# Altium PCB dv_analog_6_ch.PcbDoc (part 2 of 2)
Units mm, origin at the board's own origin, x right, y up, seen from the top; angles counter-clockwise.
Board outline 86.22 x 62.2 mm, 4 copper layers (Top Layer, GND, power, Bottom Layer), stack 1.781 mm thick; 215 components, 117 nets, 545 pads, 83 vias.
Unrouted connection lines stored in the file: 307.
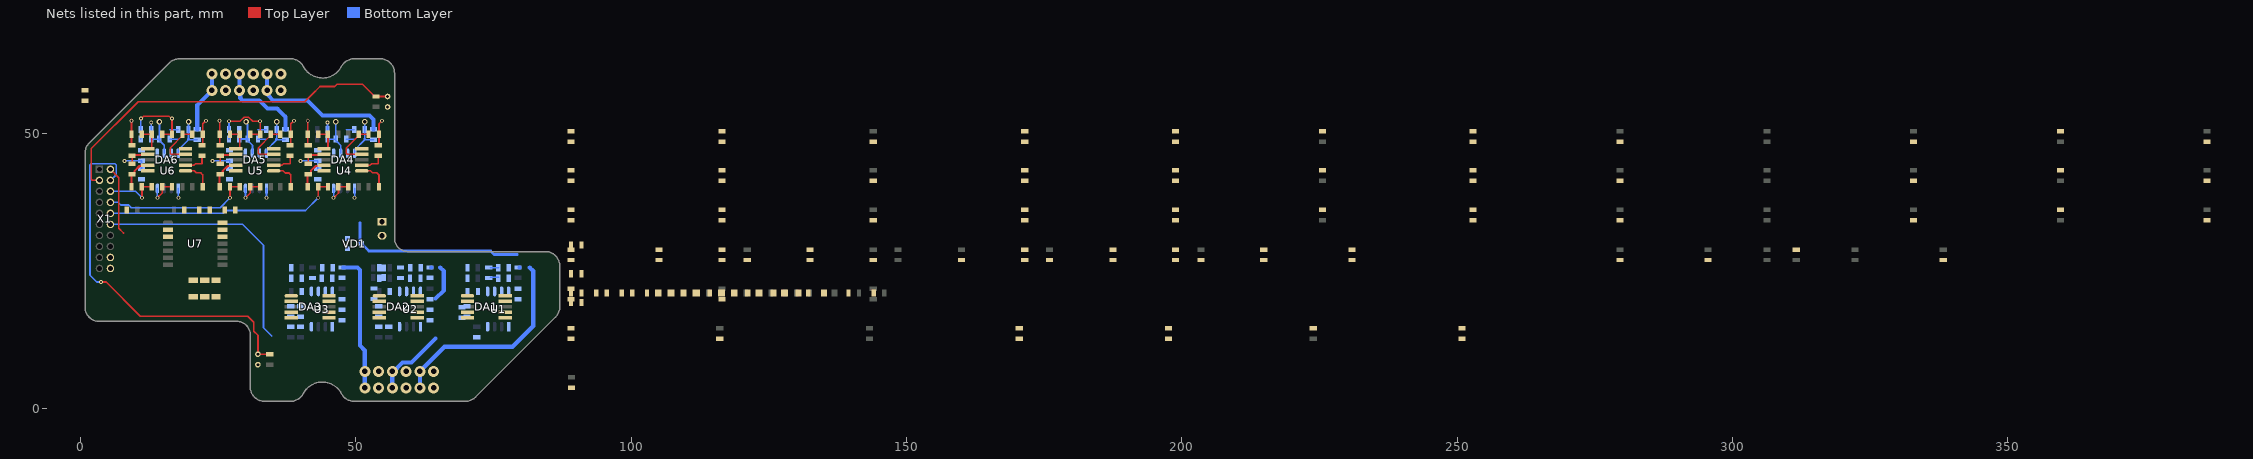
[diagram p4: the nets of this part, all layers, seen from the top]

## Via types
v1: diameter 0.7, hole 0.4, Top Layer to Bottom Layer, 38 vias
v2: diameter 2, hole 1, Top Layer to Bottom Layer, 32 vias
v3: diameter 4, hole 2.6, Top Layer to Bottom Layer, 7 vias
v4: diameter 1, hole 0.6, Top Layer to Bottom Layer, 6 vias

## Nets (pads, with @x,y where several pads share a name; then routed paths per layer and width w, separated by ;. In a path a pad name is that pad's centre, name@x,y a point inside that pad or via, vN(x,y) a via of type N, cw(c..) or ccw(c..) an arc to the next point about the centre after c; other vN are vias at no path point) (continued)
data_22_dv_analog_interface_ch5: C51.2 C54.2 C58.2 R80.2 | length 13.4
  Top Layer w0.3: v1(27,52.2) 29,52.2 29.25,52.45 29.25,52.452 29.748,52.95 30.55,52.95 31.3,52.2 v1(32.648,52.2) C54.2@32.648,49.85 C58.2@30.864,49.85
  Bottom Layer w0.3: R80.2@26.99,48.95 26.99,50.4 C51.2@26.995,50.405 ; C51.2@26.99,50.675 27,50.685 v1(27,52.2)
data_22_dv_analog_interface_ch6: C63.2 C66.2 C70.2 R99.2 | length 14.4
  Top Layer w0.3: v1(11,52.7) 11.108,52.7 11.536,53.128 16.112,53.128 16.54,52.7 v1(16.648,52.7) C66.2@16.648,49.85 C70.2@14.864,49.85
  Bottom Layer w0.3: R99.2@10.99,48.95 10.99,50.4 10.995,50.405 10.995,52.695 v1(11,52.7)
data_23: C35.2 R52.1 R53.2 R54.2 X1.12 | length 46.5
  Bottom Layer w0.3: X1.12@5.466,33.468 29.489,33.468 33.25,29.707 33.25,14.707 34.757,13.2
data_24: C47.2 R71.1 R72.2 R73.2 X1.10 | length 42.7
  Top Layer w0.3: v1@43.186,38.249 v1@43.191,38.244 ; v1(43.191,38.3) 43.188,38.303 43.188,40.294 R72.2@43.186,40.297 C47.2@44.969,40.297
  Bottom Layer w0.3: X1.10@5.466,35.468 25.968,35.468 26.5,36 40.891,36 v1(43.191,38.3)
data_25: C59.2 R90.1 R91.2 R92.2 X1.8 | length 26.7
  Top Layer w0.3: v1@27.186,38.249 v1@27.191,38.244 ; v1(27.191,38.3) 27.188,38.303 27.188,40.294 R91.2@27.186,40.297 C59.2@28.969,40.297
  Bottom Layer w0.3: X1.8@5.466,37.468 6.825,37.468 7.311,36.982 8.768,36.982 9.25,36.5 25.391,36.5 v1(27.191,38.3)
data_26: C71.2 R109.1 R110.2 R111.2 X1.6 | length 10
  Top Layer w0.3: v1@11.186,38.249 v1@11.191,38.244 ; v1(11.191,38.3) 11.188,38.303 11.188,40.294 R110.2@11.186,40.297 C71.2@12.969,40.297
  Bottom Layer w0.3: X1.6@5.466,39.468 10.023,39.468 v1(11.191,38.3)
GND: C73.2 C74.2 C75.2 L1.2 R118.2 U7.13 X1.18 | length 1.9
  Bottom Layer w0.3: 48.5,29.05 48.5,30.95
GNDA: C2.1 C3.1 C4.2 C5.1 C7.1 C8.1 C11.1 C14.1 C15.1 C16.2 C17.1 C19.1 C20.1 C23.1 C26.1 C27.1 C28.2 C29.1 C31.1 C32.1 C35.1 C38.1 C39.1 C40.2 C41.1 C43.1 C44.1 C47.1 C50.1 C51.1 C52.2 C53.1 C55.1 C56.1 C59.1 C62.1 C63.1 C64.2 C65.1 C67.1 C68.1 C71.1 L1.1 R9.1 R10.1 R12.2 R16.1 R28.1 R29.1 R31.2 R35.1 R47.1 R48.1 R50.2 R54.1 R66.1 R67.1 R69.2 R73.1 R85.1 R86.1 R88.2 R92.1 R104.1 R105.1 R107.2 R111.1 RK1.2 RK2.2 U1.1 U2.1 U3.1 U4.1 U5.1 U6.1 X1.20 | length 53.2
  Top Layer w0.3: v1(13.99,38.3) 14.869,39.179 C71.1@14.869,40.297 C67.1@16.643,40.297 ; R107.2@22.1,47.871 22.227,47.998 R105.1@22.227,49.85 22.227,51.727 v1(22.8,52.3) ; v1(29.99,38.3) 30.869,39.179 C59.1@30.869,40.297 C55.1@32.643,40.297 ; R88.2@38.1,47.871 38.227,47.998 R86.1@38.227,49.85 38.227,51.727 v1(38.8,52.3) ; v1(45.99,38.3) 46.869,39.179 C47.1@46.869,40.297 C43.1@48.643,40.297 ; R69.2@54.1,47.871 54.227,47.998 R67.1@54.227,49.85 54.227,51.727 v1(54.8,52.3)
  Bottom Layer w0.3: v1(8,45) 8.025,45.025 C62.1@11.112,45.025 C65.1@11.112,43.554 ; C63.1@12.89,50.675 v1(12.89,52) ; v1(13.99,38.3) 13.99,40 ; v1(17.8,38.3) U6.1@17.8,40 ; v1(24,45) 24.025,45.025 C50.1@27.112,45.025 C53.1@27.112,43.554 ; v1(29.99,38.3) 29.99,40 ; v1(33.8,38.3) U5.1@33.8,40 ; v1(40,45) 40.025,45.025 C38.1@43.112,45.025 C41.1@43.112,43.554 ; C39.1@44.89,50.675 v1(44.89,52) ; v1(45.99,38.3) 45.99,40 ; v1(49.8,38.3) U4.1@49.8,40
  other v2: 54.15,3.8 59.15,3.8 64.15,3.8 54.15,6.8 59.15,6.8 64.15,6.8 26.4,57.8 31.4,57.8 36.4,57.8 26.4,60.8 31.4,60.8 36.4,60.8
GPIO_1: X1.2 | length 12.6
  Top Layer w0.3: X1.2@5.466,43.468 7,41.934 7,32.75 7.85,31.9
Guard_dv_analog_interface_ch1: U1.7
Guard_dv_analog_interface_ch2: U2.7
Guard_dv_analog_interface_ch3: U3.7
Guard_dv_analog_interface_ch4: U4.7
Guard_dv_analog_interface_ch5: U5.7
Guard_dv_analog_interface_ch6: U6.7
input1: R3.1 | length 37.9
  Bottom Layer w0.75: v2(61.65,3.8) v2(61.65,6.8) 66.1,11.25 78.5,11.25 82.25,15 82.25,25 81.6,25.65
input2: R22.1 | length 19.7
  Bottom Layer w0.75: v2(56.65,3.8) 56.65,6.527 58.498,8.375 60.125,8.375 64.5,12.75 ; 64.5,20 66,21.5 66,25 65.35,25.65
  other v2: 56.65,6.8
input3: R41.1 | length 25
  Bottom Layer w0.75: R41.1@47.716,25.65 50.361,25.65 50.8,25.211 50.8,11.45 51.65,10.6 v2(51.65,6.8) v2(51.65,3.8)
input4: R60.1 | length 26.7
  Bottom Layer w0.75: v2(33.9,60.8) v2(33.9,57.8) 34.139,57.561 34.139,56.861 35,56 41.25,56 44,53.25 52.5,53.25 53.241,52.509 R60.1@53.241,50.75
input5: R79.1 | length 16.3
  Bottom Layer w0.75: v2(28.9,60.8) v2(28.9,57.8) 29.045,57.655 29.045,56.439 29.484,56 32.5,56 34,54.5 35.75,54.5 37.241,53.009 R79.1@37.241,50.75
input6: R98.1 | length 11.2
  Bottom Layer w0.75: R98.1@21.241,50.75 21.241,55.141 v2(23.9,57.8) v2(23.9,60.8)
NetC1_1: C1.1 R1.1 R3.2 U1.8
NetC1_2: C1.2 R1.2 R4.1 U1.6
NetC2_2: C2.2 R2.1 U1.5
NetC4_1: C4.1 R5.2 U1.4
NetC5_2: C5.2 DA1.8 R6.1
NetC6_1: C6.1 DA1.3 R10.2
NetC8_2: C8.2 DA1.4 R11.2
NetC9_1: C9.1 DA1.1 R8.1 R13.2 | length 1.5
  Bottom Layer w0.3: 16.266,48.95 17.742,48.95
NetC9_2: C9.2 DA1.2 R12.1 R13.1
NetC10_1: C10.1 DA1.5 R17.2
NetC12_1: C12.1 DA1.7 R15.1 R19.2
NetC12_2: C12.2 DA1.6 R18.1 R19.1
NetC13_1: C13.1 R20.1 R22.2 U2.8
NetC13_2: C13.2 R20.2 R23.1 U2.6
NetC14_2: C14.2 R21.1 U2.5
NetC16_1: C16.1 R24.2 U2.4
NetC17_2: C17.2 DA2.8 R25.1 | length 4.7
  Top Layer w0.3: 19.044,44.2 20.6,44.2 20.9,44.5 22.1,44.5 22.1,45.971
NetC18_1: C18.1 DA2.3 R29.2
NetC20_2: C20.2 DA2.4 R30.2
NetC21_1: C21.1 DA2.1 R27.1 R32.2 | length 1.5
  Bottom Layer w0.3: 32.266,48.95 33.742,48.95
NetC21_2: C21.2 DA2.2 R31.1 R32.1
NetC22_1: C22.1 DA2.5 R36.2
NetC24_1: C24.1 DA2.7 R34.1 R38.2
NetC24_2: C24.2 DA2.6 R37.1 R38.1
NetC25_1: C25.1 R39.1 R41.2 U3.8
NetC25_2: C25.2 R39.2 R42.1 U3.6
NetC26_2: C26.2 R40.1 U3.5
NetC28_1: C28.1 R43.2 U3.4 | length 1.5
  Bottom Layer w0.3: 16.266,50.675 17.743,50.675
NetC29_2: C29.2 DA3.8 R44.1
NetC30_1: C30.1 DA3.3 R48.2
NetC32_2: C32.2 DA3.4 R49.2
NetC33_1: C33.1 DA3.1 R46.1 R51.2
NetC33_2: C33.2 DA3.2 R50.1 R51.1
NetC34_1: C34.1 DA3.5 R55.2
NetC36_1: C36.1 DA3.7 R53.1 R57.2
NetC36_2: C36.2 DA3.6 R56.1 R57.1
NetC37_1: C37.1 R58.1 R60.2 U4.8 | length 9.6
  Bottom Layer w0.3: R58.1@48.266,48.95 49.742,48.95 ; U4.8@49.8,46.4 49.8,46.972 51.643,48.814 51.643,48.949 ; 51.642,48.95 51.643,48.949 ; v4(51.643,52.1) C37.1@51.643,50.675 51.643,48.949 ; R60.2@53.241,48.85 51.742,48.85 51.643,48.949
NetC37_2: C37.2 R58.2 R61.1 U4.6 | length 9.1
  Bottom Layer w0.3: R61.1@44.89,48.95 R58.2@46.366,48.95 ; v4(46.366,52.1) 46.366,50.675 R58.2@46.366,48.95 ; U4.6@47.26,46.4 47.26,47.861 46.63,48.49 46.575,48.49 46.366,48.7 R58.2@46.366,48.95 ; 48.266,50.675 C37.2@49.743,50.675
NetC38_2: C38.2 R59.1 U4.5
NetC40_1: C40.1 R62.2 U4.4
NetC41_2: C41.2 DA4.8 R63.1
NetC42_1: C42.1 DA4.3 R67.2 | length 9
  Top Layer w0.3: DA4.3@51.044,46.2 48.476,46.2 48.3,46.376 48.3,47.352 50.548,49.6 C42.1@50.548,49.85 R67.2@52.327,49.85
NetC44_2: C44.2 DA4.4 R68.2
NetC45_1: C45.1 DA4.1 R65.1 R70.2 | length 5.7
  Top Layer w0.3: DA4.1@51.044,43.2 52.7,43.2 53.05,42.85 53.85,42.85 54.1,42.6 54.227,42.473 R65.1@54.227,40.297
NetC45_2: C45.2 DA4.2 R69.1 R70.1 | length 4.7
  Top Layer w0.3: DA4.2@51.044,44.2 52.6,44.2 52.9,44.5 54.1,44.5 R69.1@54.1,45.971
NetC46_1: C46.1 DA4.5 R74.2 | length 4.6
  Top Layer w0.3: R74.2@43.186,49.85 C46.1@44.964,49.85 ; DA4.5@44.242,47.2 44.797,47.2 44.964,47.367 C46.1@44.964,49.35
NetC48_1: C48.1 DA4.7 R72.1 R76.2 | length 6.1
  Top Layer w0.381: R72.1@41.286,40.297 41.286,42.486 R76.2@41.4,42.6 41.65,42.6 41.859,42.81 41.859,43.187 42.746,44.073 44.115,44.073 DA4.7@44.242,44.2
NetC48_2: C48.2 DA4.6 R75.1 R76.1 | length 4.4
  Top Layer w0.3: R76.1@41.4,44.5 R75.1@41.4,45.971 41.514,46.086 44.128,46.086 DA4.6@44.242,46.2
NetC49_1: C49.1 R77.1 R79.2 U5.8 | length 8.1
  Bottom Layer w0.3: U5.8@33.8,46.4 33.8,46.972 35.643,48.814 35.643,48.949 ; 35.642,48.95 35.643,48.949 ; v4(35.643,52.1) C49.1@35.643,50.675 35.643,48.949 ; R79.2@37.241,48.85 35.742,48.85 35.643,48.949
NetC49_2: C49.2 R77.2 R80.1 U5.6 | length 9.2
  Bottom Layer w0.3: v4(30.1,52.1) 30.1,51.911 30.366,51.645 30.366,50.675 R77.2@30.366,48.95 30.366,48.7 30.575,48.49 30.63,48.49 31.26,47.861 U5.6@31.26,46.4 ; 32.266,50.675 C49.2@33.743,50.675
  Bottom Layer w0.381: R80.1@28.89,48.95 R77.2@30.366,48.95
NetC50_2: C50.2 R78.1 U5.5
NetC52_1: C52.1 R81.2 U5.4
NetC53_2: C53.2 DA5.8 R82.1
NetC54_1: C54.1 DA5.3 R86.2 | length 9
  Top Layer w0.3: DA5.3@35.044,46.2 32.476,46.2 32.3,46.376 32.3,47.352 34.548,49.6 C54.1@34.548,49.85 R86.2@36.327,49.85
NetC56_2: C56.2 DA5.4 R87.2
NetC57_1: C57.1 DA5.1 R84.1 R89.2 | length 5.6
  Top Layer w0.3: DA5.1@35.1,43.2 36.8,43.2 37.207,42.793 37.907,42.793 38.1,42.6 38.227,42.473 R84.1@38.227,40.297
NetC57_2: C57.2 DA5.2 R88.1 R89.1 | length 4.7
  Top Layer w0.3: DA5.2@35.044,44.2 36.6,44.2 36.9,44.5 38.1,44.5 R88.1@38.1,45.971
NetC58_1: C58.1 DA5.5 R93.2 | length 4.6
  Top Layer w0.3: R93.2@27.186,49.85 C58.1@28.964,49.85 ; DA5.5@28.242,47.2 28.797,47.2 28.964,47.367 C58.1@28.964,49.35
NetC60_1: C60.1 DA5.7 R91.1 R95.2 | length 6.1
  Top Layer w0.381: R91.1@25.286,40.297 25.286,42.486 R95.2@25.4,42.6 25.65,42.6 25.859,42.81 25.859,43.187 26.746,44.073 28.115,44.073 DA5.7@28.242,44.2
NetC60_2: C60.2 DA5.6 R94.1 R95.1 | length 4.4
  Top Layer w0.3: R95.1@25.4,44.5 R94.1@25.4,45.971 25.514,46.086 28.128,46.086 DA5.6@28.242,46.2
NetC61_1: C61.1 R96.1 R98.2 U6.8 | length 8.1
  Bottom Layer w0.3: U6.8@17.8,46.4 17.8,46.972 19.643,48.814 19.643,48.949 ; 19.642,48.95 19.643,48.949 ; v4(19.643,52.1) C61.1@19.643,50.675 19.643,48.949 ; R98.2@21.241,48.85 19.742,48.85 19.643,48.949
NetC61_2: C61.2 R96.2 R99.1 U6.6 | length 7.6
  Bottom Layer w0.3: R99.1@12.89,48.95 R96.2@14.366,48.95 ; v4@14.3,52.1 v4@14.333,52.067 ; v4(14.366,52.1) 14.366,50.675 R96.2@14.366,48.95 ; U6.6@15.26,46.4 15.26,47.861 14.63,48.49 14.575,48.49 14.366,48.7 R96.2@14.366,48.95
NetC62_2: C62.2 R97.1 U6.5
NetC64_1: C64.1 R100.2 U6.4
NetC65_2: C65.2 DA6.8 R101.1
NetC66_1: C66.1 DA6.3 R105.2 | length 9
  Top Layer w0.3: DA6.3@19.044,46.2 16.476,46.2 16.3,46.376 16.3,47.352 18.548,49.6 C66.1@18.548,49.85 R105.2@20.327,49.85
NetC68_2: C68.2 DA6.4 R106.2
NetC69_1: C69.1 DA6.1 R103.1 R108.2 | length 7.1
  Top Layer w0.3: DA6.1@19.044,43.2 20.7,43.2 21.05,42.85 21.85,42.85 22.1,42.6 22.227,42.473 R103.1@22.227,40.297
  Bottom Layer w0.3: 74.466,23.85 75.942,23.85
NetC69_2: C69.2 DA6.2 R107.1 R108.1
NetC70_1: C70.1 DA6.5 R112.2 | length 4.6
  Top Layer w0.3: R112.2@11.186,49.85 C70.1@12.964,49.85 ; DA6.5@12.242,47.2 12.797,47.2 12.964,47.367 C70.1@12.964,49.35
NetC72_1: C72.1 DA6.7 R110.1 R114.2 | length 6.1
  Top Layer w0.381: R110.1@9.286,40.297 9.286,42.486 R114.2@9.4,42.6 9.65,42.6 9.86,42.81 9.86,43.187 10.746,44.073 12.115,44.073 DA6.7@12.242,44.2
NetC72_2: C72.2 DA6.6 R113.1 R114.1 | length 4.4
  Top Layer w0.3: R114.1@9.4,44.5 R113.1@9.4,45.971 9.514,46.086 12.128,46.086 DA6.6@12.242,46.2
NetC73_1: C73.1 C74.1 C75.1 R121.1 VD1.1 VD1.2 X2.1
NetR117_1: R117.1 R119.2
NetR118_1: R118.1 U7.2 U7.3
NetR119_1: R119.1 R120.2 U7.12 | length 1.5
  Bottom Layer w0.3: 74.466,25.575 75.943,25.575
NetU7_14: U7.14 VD1.3 X2.2 | length 33
  Bottom Layer w0.5: 50.79,33.75 50.79,30.2 50.99,30 51.025,30 52.385,28.64 63,28.64 65.25,28.64 74.514,28.64 75.154,28 79.339,28
Temp_1: R115.1 RK1.1 X1.3 | length 66.7
  Top Layer w0.3: X1.3@3.466,41.468 3.434,41.5 2.176,41.5 2,41.676 2,47.25 10.5,55.75 40.76,55.75 42.05,57.04 43.51,58.5 46.175,58.5 46.625,58.95 49.29,58.95 51.2,58.95 53.45,56.7 R115.1@53.7,56.7 RK1.1@55.8,56.7
Temp_2: R116.1 RK2.1 X1.4 | length 69.8
  Top Layer w0.3: v1(3.75,23) 4.7,23 10.9,16.8 30.4,16.8 31.5,15.7 31.5,14.072 32.25,13.322 RK2.1@32.25,9.905 32.252,9.902 34.397,9.902 R116.1@34.4,9.9
  Bottom Layer w0.3: v1(3.75,23) 3,23 1.75,24.25 1.75,44.328 1.926,44.504 6.246,44.504 6.502,44.248 6.502,42.504 X1.4@5.466,41.468
Voffset: R17.1 R18.2 R36.1 R37.2 R55.1 R56.2 R74.1 R75.2 R93.1 R94.2 R112.1 R113.2 | length 14.1
  Top Layer w0.3: v1@9.289,52.523 9.289,52.3 9.286,52.297 R112.1@9.286,49.85 9.286,47.985 R113.2@9.4,47.871 ; v1@25.289,52.523 25.289,52.3 25.286,52.297 R93.1@25.286,49.85 25.286,47.985 R94.2@25.4,47.871 ; v1@41.289,52.523 41.289,52.3 41.286,52.297 R74.1@41.286,49.85 41.286,47.985 R75.2@41.4,47.871
  other v1: 9.286,52.3 25.286,52.3 41.286,52.3
pads on no net: DA1.0 DA2.0 DA3.0 DA4.0 DA5.0 DA6.0 U1.2 U1.3 U2.2 U2.3 U3.2 U3.3 U4.2 U4.3 U5.2 U5.3 U6.2 U6.3 U7.1 U7.4 U7.5 U7.6 U7.7 U7.8 U7.9 U7.10 U7.11
copper on no net: | length 978.4
  Top Layer w0.2: 5.466,15.95 3.466,15.95 cw(c3.466,18.45) 0.966,18.45 0.966,46.414 cw(c3.466,46.414) 1.699,48.182 16.234,62.718 cw(c18.002,60.95) 18.002,63.45 38.2,63.45 cw(c38.2,60.95) 40.418,62.104 ccw(c43.966,63.95) 47.515,62.104 ; 12.015,58.452 18.005,58.452 ; 18.005,58.45 ccw(c18.005,60.95) 20.505,60.95 cw(c23.505,60.95) 21.847,63.45 ; 30.966,3.95 ccw(c33.466,3.95) 33.466,1.45 38.2,1.45 ccw(c38.2,3.95) 40.418,2.796 cw(c43.966,0.95) 47.515,2.796 ccw(c49.733,3.95) 49.733,1.45 69.931,1.45 ccw(c69.931,3.95) 71.699,2.182 86.234,16.718 ccw(c84.466,18.486) 86.966,18.486 ; 30.966,7.792 ccw(c33.466,9.45) 33.466,6.45 cw(c33.466,3.95) 35.562,5.314 ccw(c38.076,6.95) 38.076,3.95 41.321,3.95 ; 46.601,60.94 49.613,60.94 cw(c49.857,57.95) 52.371,59.586 ccw(c54.466,60.95) 54.466,58.45 cw(c54.466,55.45) 56.966,57.108 ; 66.089,1.45 ccw(c64.431,3.95) 67.431,3.95 cw(c69.931,3.95) 69.931,6.45 75.724,6.45 ccw(c75.724,9.45) 75.977,6.461 ; 0.951,46.412 cw(c3.451,46.412) 1.684,48.179 ; 0.951,46.412 cw(c3.451,46.412) 1.684,48.179 ; 0.951,46.412 0.951,18.447 ccw(c3.451,18.447) 3.451,15.947 28.451,15.947 cw(c28.451,13.447) 30.951,13.447 30.951,3.947 ccw(c33.451,3.947) 33.451,1.447 38.185,1.447 ccw(c38.185,3.947) 40.403,2.793 cw(c43.951,0.947) 47.5,2.793 ccw(c49.718,3.947) 49.718,1.447 69.916,1.447 ccw(c69.916,3.947) 71.684,2.179 86.219,16.715 ccw(c84.451,18.483) 86.951,18.483 86.951,25.947 ccw(c84.451,25.947) 84.451,28.447 59.451,28.447 cw(c59.451,30.947) 56.951,30.947 56.951,60.947 ccw(c54.451,60.947) 54.451,63.447 49.718,63.447 ccw(c49.718,60.947) 47.5,62.101 cw(c43.951,63.947) 40.403,62.101 ccw(c38.185,60.947) 38.185,63.447 17.987,63.447 ccw(c17.987,60.947) 16.219,62.715 1.684,48.179
  Top Layer w0.3: 49,56.7 v1(49,58.25)
  Bottom Layer w0.2: 5.466,15.95 3.466,15.95 cw(c3.466,18.45) 0.966,18.45 0.966,46.414 cw(c3.466,46.414) 1.699,48.182 16.234,62.718 cw(c18.002,60.95) 18.002,63.45 38.2,63.45 cw(c38.2,60.95) 40.418,62.104 ccw(c43.966,63.95) 47.515,62.104 ; 12.015,58.452 18.005,58.452 ; 18.005,58.45 ccw(c18.005,60.95) 20.505,60.95 cw(c23.505,60.95) 21.847,63.45 ; 30.966,3.95 ccw(c33.466,3.95) 33.466,1.45 38.2,1.45 ccw(c38.2,3.95) 40.418,2.796 cw(c43.966,0.95) 47.515,2.796 ccw(c49.733,3.95) 49.733,1.45 69.931,1.45 ccw(c69.931,3.95) 71.699,2.182 86.234,16.718 ccw(c84.466,18.486) 86.966,18.486 ; 30.966,7.792 ccw(c33.466,9.45) 33.466,6.45 cw(c33.466,3.95) 35.562,5.314 ccw(c38.076,6.95) 38.076,3.95 41.321,3.95 ; 46.601,60.94 49.613,60.94 cw(c49.857,57.95) 52.371,59.586 ccw(c54.466,60.95) 54.466,58.45 cw(c54.466,55.45) 56.966,57.108 ; 66.089,1.45 ccw(c64.431,3.95) 67.431,3.95 cw(c69.931,3.95) 69.931,6.45 75.724,6.45 ccw(c75.724,9.45) 75.977,6.461 ; 0.951,46.412 cw(c3.451,46.412) 1.684,48.179 ; 0.951,46.412 cw(c3.451,46.412) 1.684,48.179 ; 0.951,46.412 0.951,18.447 ccw(c3.451,18.447) 3.451,15.947 28.451,15.947 cw(c28.451,13.447) 30.951,13.447 30.951,3.947 ccw(c33.451,3.947) 33.451,1.447 38.185,1.447 ccw(c38.185,3.947) 40.403,2.793 cw(c43.951,0.947) 47.5,2.793 ccw(c49.718,3.947) 49.718,1.447 69.916,1.447 ccw(c69.916,3.947) 71.684,2.179 86.219,16.715 ccw(c84.451,18.483) 86.951,18.483 86.951,25.947 ccw(c84.451,25.947) 84.451,28.447 59.451,28.447 cw(c59.451,30.947) 56.951,30.947 56.951,60.947 ccw(c54.451,60.947) 54.451,63.447 49.718,63.447 ccw(c49.718,60.947) 47.5,62.101 cw(c43.951,63.947) 40.403,62.101 ccw(c38.185,60.947) 38.185,63.447 17.987,63.447 ccw(c17.987,60.947) 16.219,62.715 1.684,48.179
  Bottom Layer w0.3: v1@42.75,56.8 42.75,57.55 43.2,58 44.5,58 ; v1@42.8,56.8 v1(42.75,56.75) 42.75,56 43.2,55.55 44.5,55.55 ; 46.4,58 46.506,58 46.55,57.956 48.624,57.956 48.919,58.25 v1(49,58.25)
  other v2: 48,6.5 56.3,11.2 59.5,11.2 48,11.55 28.65,54 31.65,54 40,54.25 40,59
  other v3: 33.466,3.95 69.931,3.95 3.966,18.45 83.951,25.447 43.966,32.45 18.002,60.95 54.466,60.95

## Polygon pours and split planes (outlines as drawn)
data_11 on Top Layer "NONET_L04_P-001" (solid, pour order 10): 75.971,6.513 69.981,6.515 ccw(c69.98,3.973) 67.486,4.465 67.342,3.072 66.978,2.329 66.14,1.515 69.984,1.515 ccw(c69.984,4.228) 72.236,2.715
data_11 on Top Layer "NONET_L04_P-001" (solid, pour order 9): 41.16,3.757 ccw(c39.246,5.343) 41.345,4.011 ccw(c40.023,-35.237) 38.866,4.017 cw(c38.213,7.25) 36.451,4.461 34.712,6.201 ccw(c29.868,-11.127) 32.485,6.674 cw(c33.304,9.109) 31.343,7.449 30.996,7.858 30.996,4.017 ccw(c33.496,4.016) 33.496,1.517 38.521,1.517 39.593,1.837 40.217,2.461
data_11 on Top Layer "NONET_L04_P-001" (solid, pour order 6): 12.015,58.452 18.005,58.45 ccw(c18.006,60.993) 20.5,60.5 20.644,61.893 21.008,62.637 21.846,63.45 18.002,63.45 ccw(c18.002,60.737) 15.75,62.25
data_11 on Top Layer "NONET_L04_P-001" (solid, pour order 5): 46.822,61.15 ccw(c48.736,59.564) 46.638,60.896 ccw(c47.959,100.144) 49.116,60.891 cw(c49.769,57.657) 51.531,60.446 53.271,58.707 ccw(c58.114,76.035) 55.497,58.234 cw(c54.679,55.798) 56.639,57.459 56.986,57.049 56.986,60.891 ccw(c54.486,60.891) 54.486,63.391 49.461,63.391 48.389,63.07 47.765,62.446
data_11 on Top Solder "NONET_L04_P-001" (solid): 75.911,6.43 69.921,6.432 ccw(c69.92,3.89) 67.426,4.382 67.282,2.989 66.918,2.245 66.08,1.432 69.924,1.432 ccw(c69.924,4.145) 72.176,2.632
data_11 on Top Solder "NONET_L04_P-001" (solid): 41.127,3.687 ccw(c39.213,5.273) 41.312,3.941 ccw(c39.99,-35.307) 38.833,3.946 cw(c38.18,7.18) 36.418,4.391 34.679,6.13 ccw(c29.835,-11.197) 32.452,6.603 cw(c33.271,9.039) 31.31,7.378 30.963,7.788 30.963,3.946 ccw(c33.463,3.946) 33.463,1.446 38.488,1.446 39.56,1.767 40.184,2.391
data_11 on Top Solder "NONET_L04_P-001" (solid, pour order 7): 12.034,58.476 18.024,58.474 ccw(c18.025,61.016) 20.519,60.524 20.663,61.917 21.027,62.66 21.865,63.474 18.021,63.474 ccw(c18.021,60.761) 15.769,62.274
data_11 on Top Solder "NONET_L04_P-001" (solid): 46.808,61.204 ccw(c48.722,59.618) 46.623,60.95 ccw(c47.945,100.198) 49.102,60.945 cw(c49.754,57.711) 51.516,60.5 53.256,58.76 ccw(c58.099,76.088) 55.482,58.288 cw(c54.664,55.852) 56.625,57.513 56.972,57.103 56.972,60.945 ccw(c54.472,60.945) 54.472,63.445 49.446,63.445 48.374,63.124 47.75,62.5
data_11 on Bottom Layer "NONET_L04_P-001" (solid, pour order 13): 12.015,58.452 18.005,58.45 ccw(c18.006,60.993) 20.5,60.5 20.644,61.893 21.008,62.637 21.846,63.45 18.002,63.45 ccw(c18.002,60.737) 15.75,62.25
data_11 on Bottom Layer "NONET_L04_P-001" (solid, pour order 12): 46.822,61.15 ccw(c48.736,59.564) 46.637,60.896 ccw(c47.959,100.144) 49.116,60.891 cw(c49.769,57.657) 51.531,60.446 53.271,58.707 ccw(c58.114,76.035) 55.497,58.234 cw(c54.679,55.798) 56.639,57.459 56.986,57.049 56.986,60.891 ccw(c54.486,60.891) 54.486,63.391 49.461,63.391 48.389,63.07 47.765,62.446
data_11 on Bottom Layer "NONET_L04_P-001" (solid, pour order 16): 75.971,6.513 69.981,6.515 ccw(c69.98,3.973) 67.486,4.465 67.342,3.072 66.978,2.329 66.14,1.515 69.984,1.515 ccw(c69.984,4.228) 72.236,2.715
data_11 on Bottom Layer "NONET_L04_P-001" (solid, pour order 15): 41.16,3.757 ccw(c39.246,5.343) 41.345,4.011 ccw(c40.023,-35.237) 38.866,4.017 cw(c38.213,7.25) 36.451,4.461 34.712,6.201 ccw(c29.868,-11.127) 32.485,6.674 cw(c33.304,9.109) 31.343,7.449 30.996,7.858 30.996,4.017 ccw(c33.496,4.016) 33.496,1.517 38.521,1.517 39.593,1.837 40.217,2.461
data_11 on Bottom Solder "NONET_L04_P-001" (solid): 12.034,58.476 18.024,58.474 ccw(c18.025,61.016) 20.519,60.524 20.663,61.917 21.027,62.66 21.865,63.474 18.021,63.474 ccw(c18.021,60.761) 15.769,62.274
data_11 on Bottom Solder "NONET_L04_P-001" (solid): 75.911,6.43 69.921,6.432 ccw(c69.92,3.89) 67.426,4.382 67.282,2.989 66.918,2.245 66.08,1.432 69.924,1.432 ccw(c69.924,4.145) 72.176,2.632
data_11 on Bottom Solder "NONET_L04_P-001" (solid): 41.127,3.687 ccw(c39.213,5.272) 41.312,3.941 ccw(c39.99,-35.307) 38.833,3.946 cw(c38.18,7.18) 36.418,4.391 ccw(c22.974,-7.314) 34.679,6.13 ccw(c29.835,-11.197) 32.452,6.603 cw(c33.27,9.038) 31.31,7.378 30.963,7.788 30.963,3.946 ccw(c33.463,3.946) 33.463,1.446 38.488,1.446 39.56,1.767 40.184,2.391
data_11 on Bottom Solder "NONET_L04_P-001" (solid): 46.808,61.204 ccw(c48.721,59.619) 46.623,60.95 ccw(c47.945,100.198) 49.102,60.945 cw(c49.754,57.711) 51.389,60.576 53.261,58.704 ccw(c58.667,77.746) 55.789,58.162 cw(c54.664,55.852) 56.625,57.513 56.972,57.103 56.972,60.945 ccw(c54.472,60.945) 54.472,63.445 49.446,63.445 48.374,63.124 47.75,62.5
+5V on power (split plane): 243 vertices, not listed, extent 1.36,1.855 86.556,36.121
no net on power (split plane): 1.361,46.412
no net on power (split plane): 18,63.04 17.998,63.04
+5V on power (split plane): 52.871,50 52.88,49.95 52.908,49.908 52.95,49.88 53,49.871 56.541,49.871 56.541,30.948 56.541,30.947 56.542,30.944 56.542,30.943 56.551,30.719 56.577,30.492 56.622,30.268 56.684,30.048 56.763,29.833 56.859,29.626 56.97,29.427 57.097,29.237 57.239,29.057 57.394,28.889 57.405,28.879 40.054,28.879 39.379,29.554 39.379,36.121 51.75,36.121 51.8,36.13 51.842,36.158 51.87,36.2 51.879,36.25 51.879,40.25 51.87,40.3 51.842,40.342 51.8,40.37 51.75,40.379 10.379,40.379 10.379,50.121 44.891,50.121 44.94,50.13 44.982,50.158 45.011,50.2 45.02,50.25 45.02,56.371 52.871,56.371
Voffset on power (split plane): 246 vertices, not listed, extent 1.36,11.879 82.621,63.041
no net on power (split plane): 54.452,63.037 54.451,63.037 54.452,63.037
no net on power (split plane): 85.946,17.009 85.945,17.008 85.945,17.009 85.945,17.008 85.945,17.009 85.946,17.009
no net on power (split plane): 54.46,63.038 54.452,63.037 54.46,63.038
no net on power (split plane): 18,63.04
no net on power (split plane): 38.201,63.04 38.2,63.04 38.201,63.04
no net on power (split plane): 38.206,63.04 38.202,63.04 38.201,63.04 38.202,63.04 38.206,63.04
no net on GND (split plane): 38.206,63.04 38.202,63.04 38.201,63.04 38.202,63.04 38.206,63.04
no net on GND (split plane): 38.201,63.04 38.2,63.04 38.201,63.04
no net on GND (split plane): 85.946,17.009 85.945,17.008 85.945,17.009 85.945,17.008 85.945,17.009 85.946,17.009
no net on GND (split plane): 54.452,63.037 54.451,63.037 54.452,63.037
no net on GND (split plane): 18,63.04
GNDA on GND (split plane): 18,63.04 17.998,63.04
GNDA on GND (split plane): 1.361,46.412
GNDA on GND (split plane): 455 vertices, not listed, extent 1.36,1.855 86.556,63.041

## Other copper
GND (plane layer: these items are gaps in the copper):
  lines w0.254: 33,37.25 33,34.25 4.25,34.25 4.25,28.25 4.25,26.75 6.5,26.75 6.5,31.5 33,31.5 33,28.25 56.5,28.25 85.4,28.2
power (plane layer: these items are gaps in the copper):
  lines w0.254: 1,36 1.25,36.25 34.75,36.25 34.75,26.75 35.563,25.937 77.313,25.937 79,24.25 79,18.271 75.75,14.75 42.75,14.75 42.75,11.75 77.25,11.75 82.75,17.25 82.75,26.75 80.75,28.75 40,28.75 39.25,29.5 39.25,36.25 51.75,36.25 51.75,40.25 10.25,40.25 10.25,50.25 44.891,50.25 44.891,56.5 53,56.5 53,50 57,50 ; 1,36.75 1.125,36.75 1.375,36.5

## Silkscreen, mask and mechanical layers (free items; w line width, h text height)
Top Solder:
  lines w0.2: 11.97,58.447 16.247,62.723 cw(c18.014,60.955) 18.014,63.455 21.859,63.455 ccw(c23.518,60.956) 20.518,60.956 cw(c18.018,60.956) 18.018,58.456 ; 12.027,58.458 18.018,58.458 ; 41.312,3.942 ccw(c43.963,0.946) 40.414,2.792 cw(c38.197,3.946) 38.197,1.446 33.463,1.446 cw(c33.463,3.946) 30.963,3.946 30.963,7.788 ccw(c33.463,9.446) 33.463,6.446 cw(c33.463,3.946) 35.558,5.31 ccw(c38.073,6.946) 38.316,3.956 41.328,3.956 ; 46.606,60.935 49.618,60.935 cw(c49.862,57.945) 52.376,59.581 ccw(c54.472,60.945) 54.472,58.445 cw(c54.472,55.445) 56.972,57.103 56.972,60.945 ccw(c54.472,60.945) 54.472,63.445 49.738,63.445 ccw(c49.738,60.945) 47.52,62.099 cw(c43.972,63.945) 46.622,60.949 ; 69.928,6.448 75.918,6.448 ; 69.928,6.45 ccw(c69.928,3.95) 67.428,3.95 cw(c64.428,3.95) 66.086,1.45 69.931,1.451 ccw(c69.931,3.951) 71.699,2.183 75.975,6.459
Bottom Solder:
  lines w0.2: 11.97,58.447 16.247,62.723 cw(c18.014,60.955) 18.014,63.455 21.859,63.455 ccw(c23.518,60.956) 20.518,60.956 cw(c18.018,60.956) 18.018,58.456 ; 12.027,58.458 18.018,58.458 ; 41.312,3.942 ccw(c43.963,0.946) 40.414,2.792 cw(c38.197,3.946) 38.197,1.446 33.463,1.446 cw(c33.463,3.946) 30.963,3.946 30.963,7.788 ccw(c33.463,9.446) 33.463,6.446 cw(c33.463,3.946) 35.558,5.31 ccw(c38.073,6.946) 38.316,3.956 41.328,3.956 ; 46.606,60.935 49.618,60.935 cw(c49.862,57.945) 52.376,59.581 ccw(c54.472,60.945) 54.472,58.445 cw(c54.472,55.445) 56.972,57.103 56.972,60.945 ccw(c54.472,60.945) 54.472,63.445 49.738,63.445 ccw(c49.738,60.945) 47.52,62.099 cw(c43.972,63.945) 46.622,60.949 ; 69.928,6.448 75.918,6.448 ; 69.928,6.45 ccw(c69.928,3.95) 67.428,3.95 cw(c64.428,3.95) 66.086,1.45 69.931,1.451 ccw(c69.931,3.951) 71.699,2.183 75.975,6.459
Mechanical 1:
  circle w0.2: c83.951,25.447 r1.35
  circle w0.2: c43.951,32.447 r1.35
  circle w0.2: c54.451,60.947 r1.35
  circle w0.2: c69.916,3.947 r1.35
  circle w0.2: c17.987,60.947 r1.35
  circle w0.2: c33.451,3.947 r1.35
  circle w0.2: c3.951,18.447 r1.35
  lines w0.2: 5.466,15.95 3.466,15.95 cw(c3.466,18.45) 0.966,18.45 0.966,46.414 cw(c3.466,46.414) 1.699,48.182 16.234,62.718 cw(c18.002,60.95) 18.002,63.45 38.2,63.45 cw(c38.2,60.95) 40.418,62.104 ccw(c43.966,63.95) 47.515,62.104 ; 30.966,3.95 ccw(c33.466,3.95) 33.466,1.45 38.2,1.45 ccw(c38.2,3.95) 40.418,2.796 cw(c43.966,0.95) 47.515,2.796 ccw(c49.733,3.95) 49.733,1.45 69.931,1.45 ccw(c69.931,3.95) 71.699,2.182 86.234,16.718 ccw(c84.466,18.486) 86.966,18.486 ; 0.951,46.412 cw(c3.451,46.412) 1.684,48.179 ; 0.951,46.412 cw(c3.451,46.412) 1.684,48.179 ; 0.951,46.412 0.951,18.447 ccw(c3.451,18.447) 3.451,15.947 28.451,15.947 cw(c28.451,13.447) 30.951,13.447 30.951,3.947 ccw(c33.451,3.947) 33.451,1.447 38.185,1.447 ccw(c38.185,3.947) 40.403,2.793 cw(c43.951,0.947) 47.5,2.793 ccw(c49.718,3.947) 49.718,1.447 69.916,1.447 ccw(c69.916,3.947) 71.684,2.179 86.219,16.715 ccw(c84.451,18.483) 86.951,18.483 86.951,25.947 ccw(c84.451,25.947) 84.451,28.447 59.451,28.447 cw(c59.451,30.947) 56.951,30.947 56.951,60.947 ccw(c54.451,60.947) 54.451,63.447 49.718,63.447 ccw(c49.718,60.947) 47.5,62.101 cw(c43.951,63.947) 40.403,62.101 ccw(c38.185,60.947) 38.185,63.447 17.987,63.447 ccw(c17.987,60.947) 16.219,62.715 1.684,48.179
Mechanical 13:
  lines w0.2: 2.466,42.468 6.466,42.468 ; 2.766,25.468 3.466,25.468 ; 2.766,27.468 3.466,27.468 ; 2.766,29.468 3.466,29.468 ; 2.766,31.468 3.466,31.468 ; 2.766,33.468 3.466,33.468 ; 2.766,35.468 3.466,35.468 ; 2.766,37.468 3.466,37.468 ; 2.766,39.468 3.466,39.468 ; 2.766,41.468 3.466,41.468 ; 3.466,24.768 3.466,25.468 ; 3.466,26.168 3.466,25.468 ; 3.466,26.768 3.466,27.468 ; 3.466,28.168 3.466,27.468 ; 3.466,28.768 3.466,29.468 ; 3.466,30.168 3.466,29.468 ; 3.466,30.768 3.466,31.468 ; 3.466,32.168 3.466,31.468 ; 3.466,32.768 3.466,33.468 ; 3.466,34.168 3.466,33.468 ; 3.466,34.768 3.466,35.468 ; 3.466,36.168 3.466,35.468 ; 3.466,36.768 3.466,37.468 ; 3.466,38.168 3.466,37.468 ; 3.466,38.768 3.466,39.468 ; 3.466,40.168 3.466,39.468 ; 3.466,40.768 3.466,41.468 ; 3.466,42.168 3.466,41.468 ; 4.166,25.468 3.466,25.468 ; 4.166,27.468 3.466,27.468 ; 4.166,29.468 3.466,29.468 ; 4.166,31.468 3.466,31.468 ; 4.166,33.468 3.466,33.468 ; 4.166,35.468 3.466,35.468 ; 4.166,37.468 3.466,37.468 ; 4.166,39.468 3.466,39.468 ; 4.166,41.468 3.466,41.468 ; 4.766,25.468 5.466,25.468 ; 4.766,27.468 5.466,27.468 ; 4.766,29.468 5.466,29.468 ; 4.766,31.468 5.466,31.468 ; 4.766,33.468 5.466,33.468 ; 4.766,35.468 5.466,35.468 ; 4.766,37.468 5.466,37.468 ; 4.766,39.468 5.466,39.468 ; 4.766,41.468 5.466,41.468 ; 5.466,24.768 5.466,25.468 ; 5.466,26.168 5.466,25.468 ; 5.466,26.768 5.466,27.468 ; 5.466,28.168 5.466,27.468 ; 5.466,28.768 5.466,29.468 ; 5.466,30.168 5.466,29.468 ; 5.466,30.768 5.466,31.468 ; 5.466,32.168 5.466,31.468 ; 5.466,32.768 5.466,33.468 ; 5.466,34.168 5.466,33.468 ; 5.466,34.768 5.466,35.468 ; 5.466,36.168 5.466,35.468 ; 5.466,36.768 5.466,37.468 ; 5.466,38.168 5.466,37.468 ; 5.466,38.768 5.466,39.468 ; 5.466,40.168 5.466,39.468 ; 5.466,40.768 5.466,41.468 ; 5.466,42.168 5.466,41.468 ; 6.166,25.468 5.466,25.468 ; 6.166,27.468 5.466,27.468 ; 6.166,29.468 5.466,29.468 ; 6.166,31.468 5.466,31.468 ; 6.166,33.468 5.466,33.468 ; 6.166,35.468 5.466,35.468 ; 6.166,37.468 5.466,37.468 ; 6.166,39.468 5.466,39.468 ; 6.166,41.468 5.466,41.468